# Altium PCB alhambra_ii_shield.PcbDoc
Units mil, origin at the board's own origin, x right, y up, seen from the top; angles counter-clockwise.
Board outline 2700 x 2100 mil, 2 copper layers (Top Layer, Bottom Layer); 4 components, 26 nets, 32 pads, 0 vias.
Unrouted connection lines stored in the file: 2.
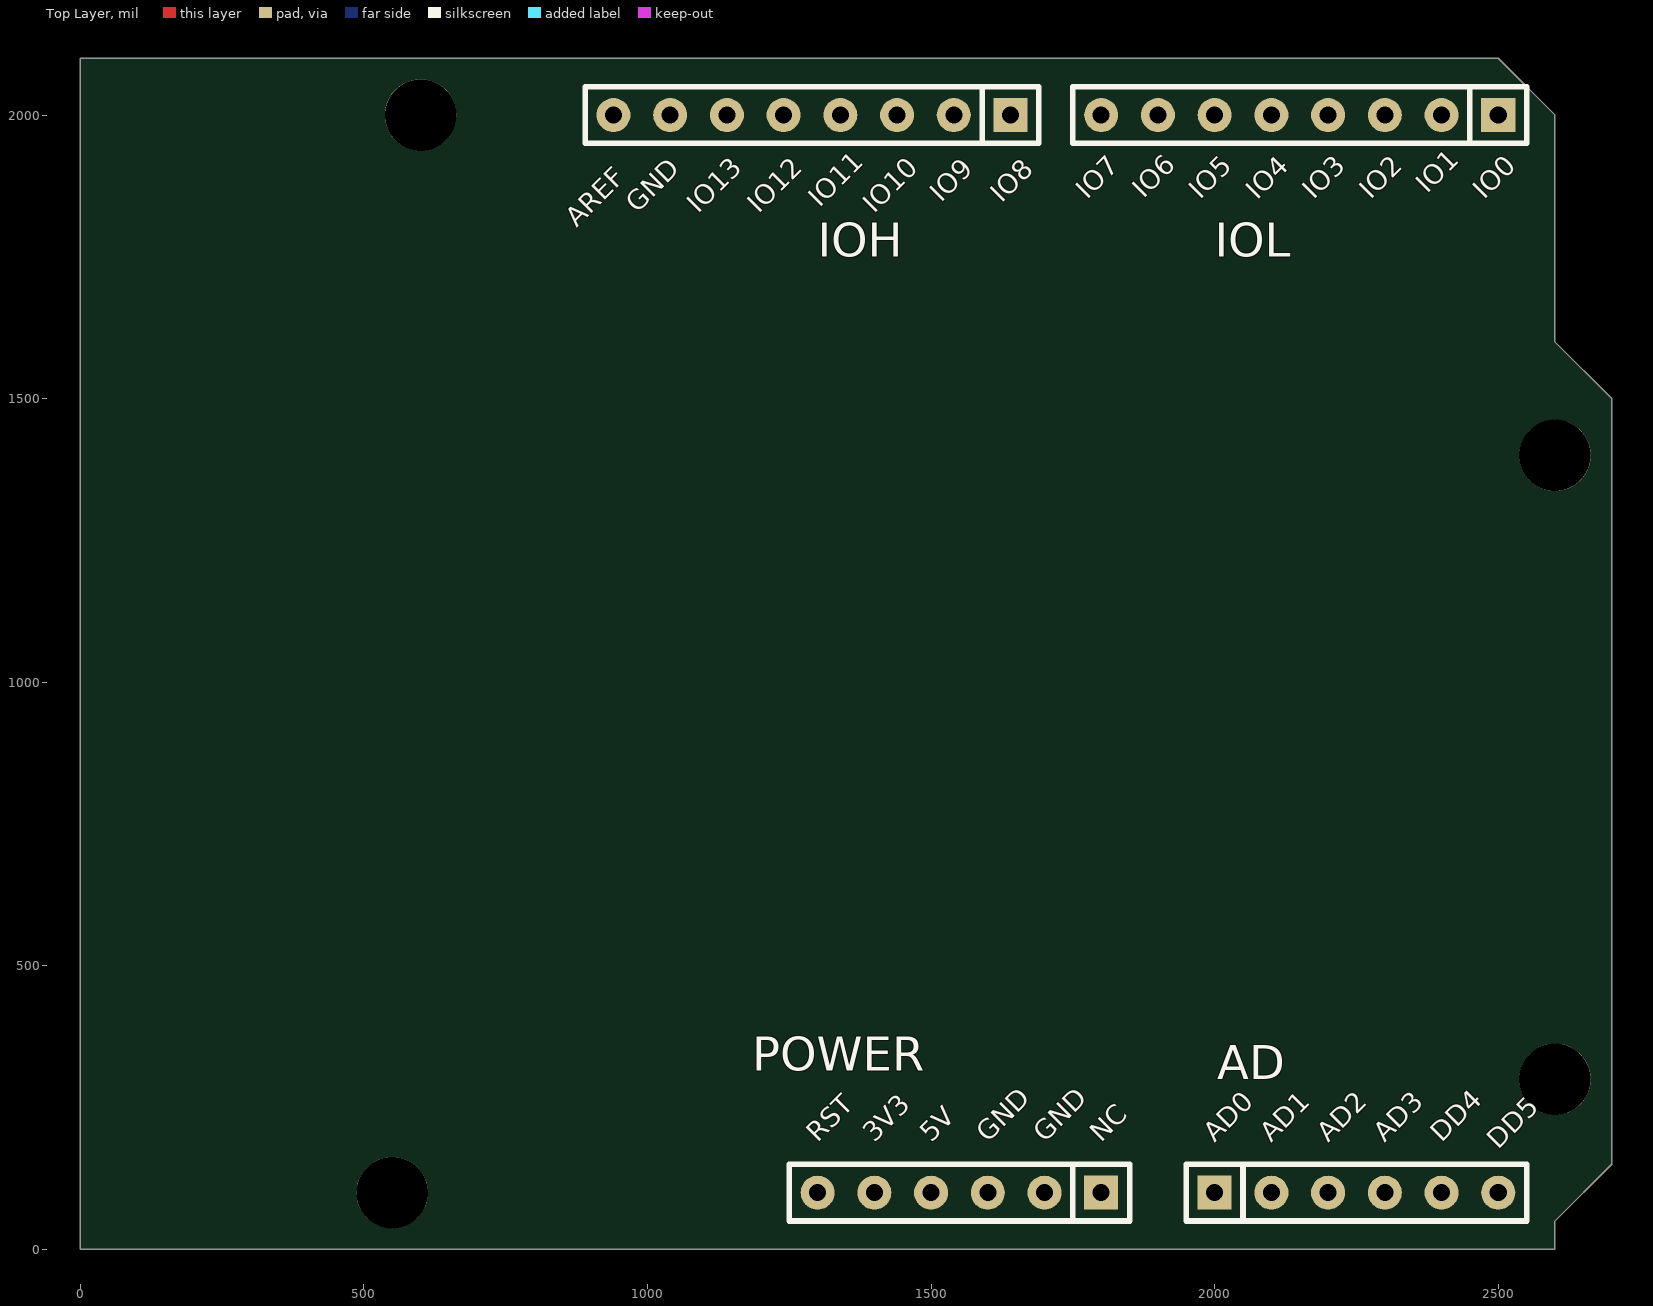
[diagram p0: Top Layer view]
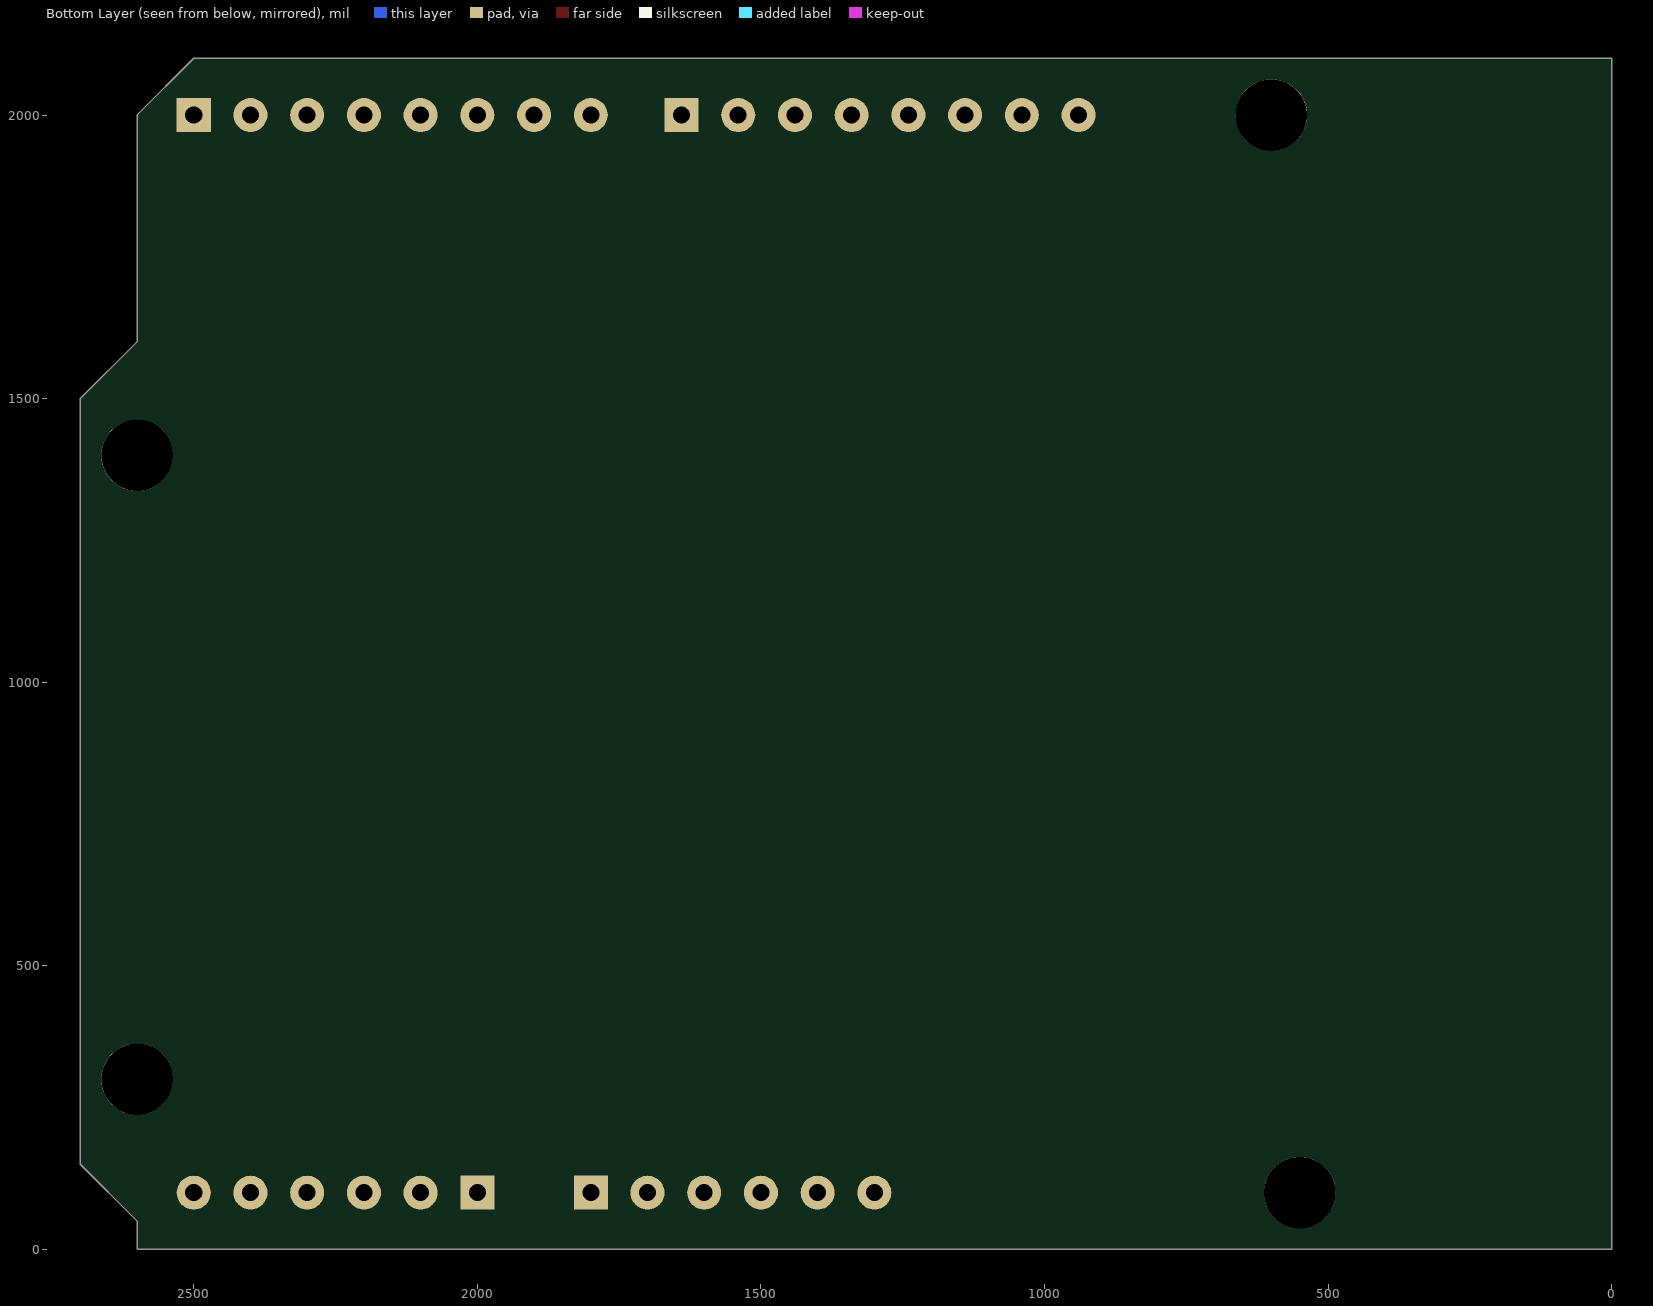
[diagram p1: Bottom Layer view, seen from below]

## Layer stack, top to bottom
Top Layer: signal copper 1.4
Dielectric: dielectric 12.6, FR-4, Dk 4.8
Bottom Layer: signal copper 1.4

## Board outline
0,0 0,2100 2500,2100 2600,2000 2600,1600 2700,1500 2700,150 2600,50 2600,0

## Design rules (kind name [scope] priority, off if disabled: settings)
Clearance [All] p1: gap=10
PolygonConnect [All] p1: connectstyle=Relief reliefconductorwidth=10 reliefentries=4 polygonreliefangle="90 Angle"
RoutingVias [All] p1: holewidth=28 width=50 viastyle="Through Hole" minholewidth=28 minwidth=50 maxholewidth=28 maxwidth=50
SilkscreenOverComponentPads [All] p1: minsilkscreentomaskgap=10
SolderMaskExpansion [All] p1: expansion=4
Width [All] p1: maxlimit=10 minlimit=10 preferedwidth=10
27 further rules are at their usual default settings.

## Components (designator, comment, footprint, x,y, rotation, side; value= is the part's Value field where it differs from the comment)
AD "AD" "Header 6x1 8.5mm" 2000,100 r0 top locked
IOH "IOH" "Header 8x1 8.5mm" 1640,2000 r180 top locked
IOL "IOL" "Header 8x1 8.5mm" 2500,2000 r180 top locked
POWER "POWER" "Header 6x1 8.5mm" 1800,100 r180 top locked

## Footprints (in the part's own frame and the unit in brackets; to place one, negate y for a bottom-side part, rotate by r counter-clockwise, add the part's x,y. Pads: shape width x height; smd on the part's side, far side on the other; paste and mask are expansions set on the pad)
"Header 6x1 8.5mm" [mil] "Stackable 6 pin header"
  rect 60x60 hole 30: 1(0,0)
  round 60 hole 30: 2(100,0) 3(200,0) 4(300,0) 5(400,0) 6(500,0)
  silkscreen extent -50,-50 550,50, body extent -50,-50 550,50, height 335
"Header 8x1 8.5mm" [mil] "Stackable 8 pin header"
  rect 60x60 hole 30: 1(0,0)
  round 60 hole 30: 2(100,0) 3(200,0) 4(300,0) 5(400,0) 6(500,0) 7(600,0) 8(700,0)
  silkscreen extent -50,-50 750,50, body extent -50,-50 750,50, height 335

## Free pads (board coordinates)
  round 125.98 hole 125.98: 0(550,100) 0(600,2000) 0(2600,300) 0(2600,1400)

## Nets (pads, with @x,y where several pads share a name; then routed paths per layer and width w, separated by ;. In a path a pad name is that pad's centre, name@x,y a point inside that pad or via, vN(x,y) a via of type N, cw(c..) or ccw(c..) an arc to the next point about the centre after c; other vN are vias at no path point)
3V3: POWER.5
5V: POWER.4
AD0: AD.1
AD1: AD.2
AD2: AD.3
AD3: AD.4
AREF: IOH.8
DD4: AD.5
DD5: AD.6
GND: IOH.7 POWER.2 POWER.3
IO0: IOL.1
IO1: IOL.2
IO2: IOL.3
IO3: IOL.4
IO4: IOL.5
IO5: IOL.6
IO6: IOL.7
IO7: IOL.8
IO8: IOH.1
IO9: IOH.2
IO10: IOH.3
IO11: IOH.4
IO12: IOH.5
IO13: IOH.6
RESET: POWER.6
VIN: POWER.1

## Silkscreen, mask and mechanical layers (free items; w line width, h text height)
Top Overlay:
  text "IO1" at 2375,1860.6 h35 r45
  text "IO6" at 1875,1851.18 h35 r45
  text "IO7" at 1775,1850 h35 r45
  text "IO5" at 1975,1850 h35 r45
  text "IO3" at 2175,1850 h35 r45
  text "IO2" at 2275,1850 h35 r45
  text "IO0" at 2475,1850 h35 r45
  text "IO4" at 2075,1848.82 h35 r45
  text "IO9" at 1517.86,1844.32 h35 r45
  text "IO8" at 1625,1843.15 h35 r45
  text "IO11" at 1303.57,1835.6 h35 r45
  text "GND" at 982.14,1826.3 h35 r45
  text "IO13" at 1089.29,1825 h35 r45
  text "IO12" at 1196.43,1825 h35 r45
  text "IO10" at 1400,1825 h35 r45
  text "AREF" at 875,1800 h35 r45
  text "RST" at 1300,187.07 h35 r45
  text "3V3" at 1400,187.07 h35 r45
  text "5V" at 1500,187.07 h35 r45
  text "GND" at 1600,187.07 h35 r45
  text "GND" at 1700,187.07 h35 r45
  text "NC" at 1800,187.07 h35 r45
  text "AD0" at 2000,187.07 h35 r45
  text "AD1" at 2100,187.07 h35 r45
  text "AD2" at 2200,187.07 h35 r45
  text "AD3" at 2300,187.07 h35 r45
  text "DD4" at 2400,187.07 h35 r45
  text "DD5" at 2500,175 h35 r45
  text "RESET" at 1295,-2515 h35 r45
  text "3v3" at 1395,-2515 h35 r45
  text "5v" at 1495,-2515 h35 r45
  text "GND" at 1595,-2515 h35 r45
  text "GND" at 1695,-2515 h35 r45
  text "Vin" at 1795,-2515 h35 r45
Mechanical 1:
  circle w5: c2600,1400 r62.99
  circle w5: c550,100 r62.99
  circle w5: c2600,300 r62.99
  circle w5: c600,2000 r62.99
  lines w5: 0,0 2600,0 2600,50 2700,150 2700,1500 2600,1600 2600,2000 2500,2100 0,2100 0,0